# Altium PCB cannonrobot.PcbDoc
Units mil, origin at the board's own origin, x right, y up, seen from the top; angles counter-clockwise.
Board outline 2135 x 2445 mil, 2 copper layers (Top Layer, Bottom Layer); 26 components, 37 nets, 162 pads, 26 vias.
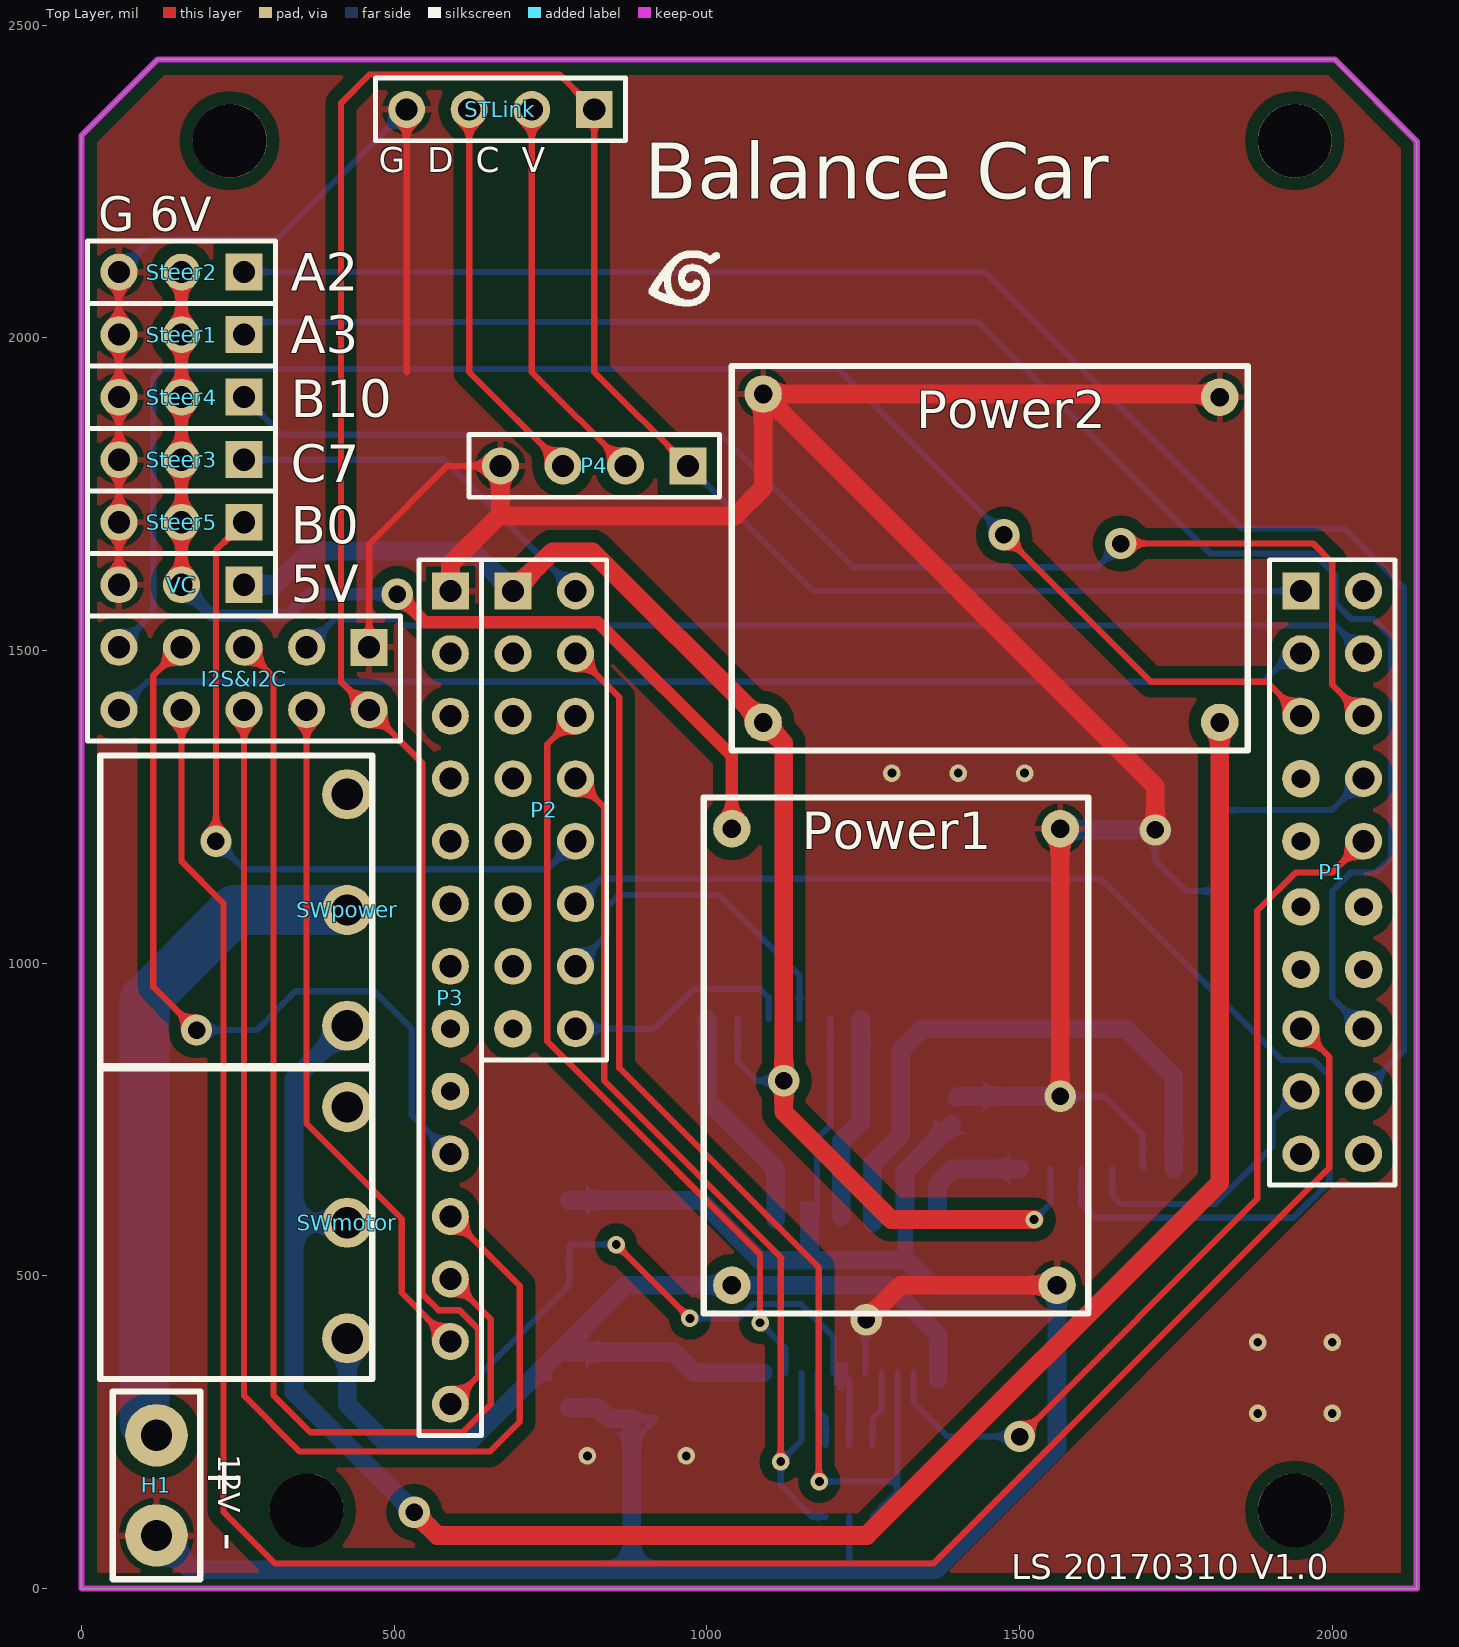
[diagram p0: Top Layer view]
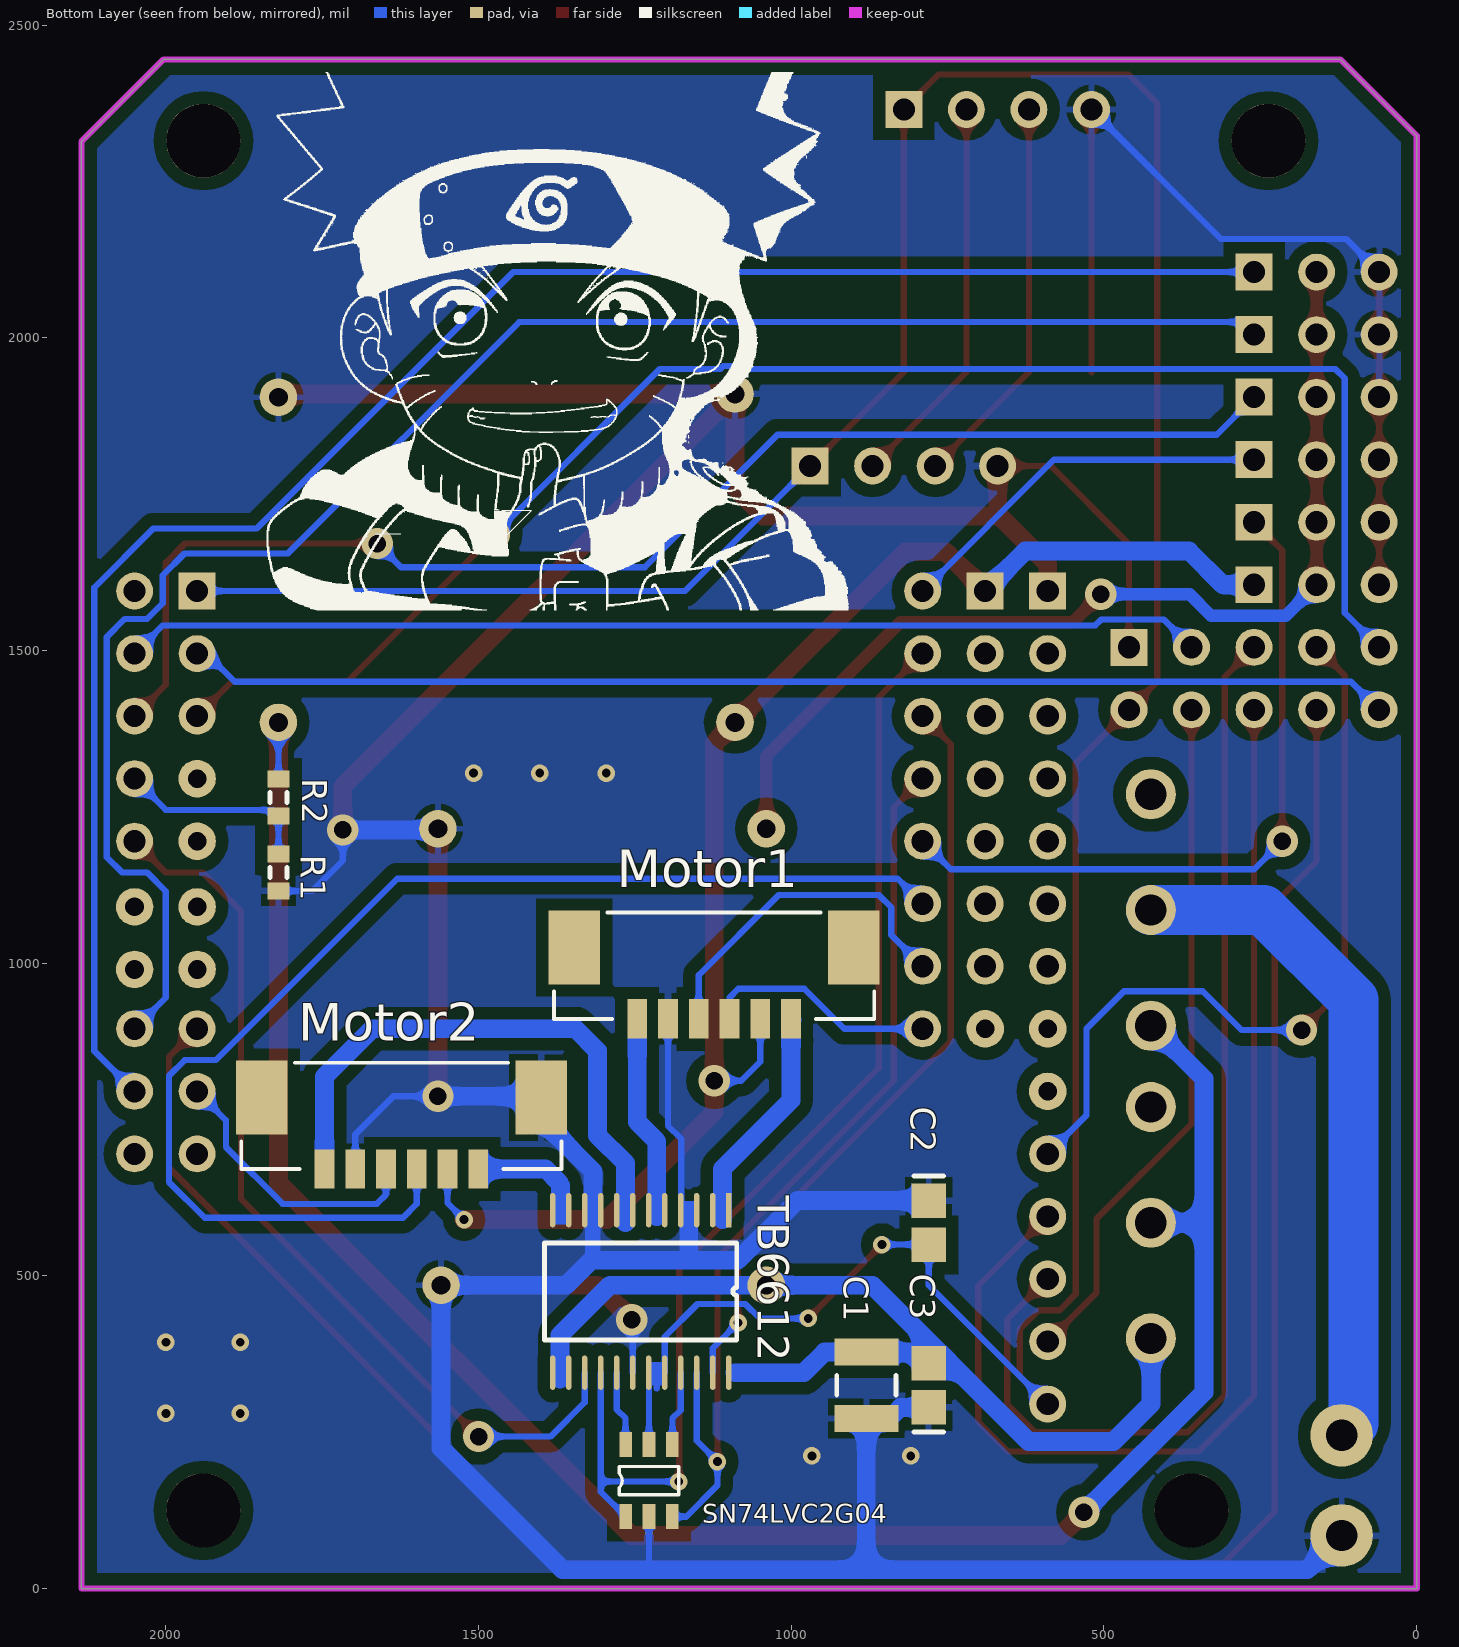
[diagram p1: Bottom Layer view, seen from below]

## Layer stack, top to bottom
Top Solder: solder mask 0.4, Solder Resist, Dk 3.5
Top Layer: signal copper 1.4
Dielectric1: dielectric 12.6, FR-4, Dk 4.8
Bottom Layer: signal copper 1.4
Bottom Solder: solder mask 0.4, Solder Resist, Dk 3.5

## Board outline
0,0 0,2322.83 122.17,2445 2003.82,2445 2135,2313.82 2135,0

## Design rules (kind name [scope] priority, off if disabled: settings)
Clearance Clearance_1 [(InPolygon)] p1: gap=20
Clearance [All] p2: gap=10
ComponentClearance [All] p1: gap=0 collisioncheckmode=3 verticalgap=0 showdistances=FALSE
HoleSize [All] p1: absolutevalues=TRUE maxlimit=200 minlimit=6 maxpercent=80.000 minpercent=20.000
MinimumSolderMaskSliver [All] p1: minsoldermaskwidth=7
PolygonConnect PolygonConnect_1 [IsPoly vs IsVia] p1: connectstyle=Direct reliefconductorwidth=10 reliefentries=4 polygonreliefangle="90 Angle" airgapwidth=10
PolygonConnect [All] p2: connectstyle=Relief reliefconductorwidth=10 reliefentries=4 polygonreliefangle="90 Angle" airgapwidth=10
RoutingVias [All] p1: holewidth=28 width=50 viastyle="Through Hole" minholewidth=28 minwidth=50 maxholewidth=28 maxwidth=50
SilkToSilkClearance [All] p1: silktosilkclearance=0
SilkToSolderMaskClearance SilkscreenOverComponentPads [IsPad] p1: minsilkscreentomaskgap=0 clearancetoexposedcopper=TRUE
SolderMaskExpansion [All] p1: expansion=4
Width [All] p1: maxlimit=100 minlimit=10 preferedwidth=10 minimp=50.000000 maximp=50.000000 favimp=50.000000
25 further rules are at their usual default settings.

## Components (designator, comment, footprint, x,y, rotation, side; value= is the part's Value field where it differs from the comment)
C1 "Cap Semi" CAPC3225L 880,325 r90 bottom locked
C2 "Cap Semi" CAPC2512L 780,585 r270 bottom locked
C3 "Cap Semi" CAPC2512L 780,325 r90 bottom locked
H1 "Header 2" PCBComponent_1#1 120,245 r0 top locked
I2S&I2C "Header 5X2" HDR2X5 460,1505 r180 top locked
Motor1 "Header 8" J_JAT_A1250WV-S-06P 900,1025 r0 bottom locked
Motor2 "Header 8" J_JAT_A1250WV-S-06P 1400,785 r0 bottom locked
P1 "Header 10X2" HDR2X10 1950,1595 r270 top locked
P2 "Header 8X2" HDR2X8 690,1595 r270 top locked
P3 "Header 14" HDR1X14 590,1595 r270 top locked
P4 "Header 4" HDR1X4 970,1795 r180 top locked
Power1 "Header 2X2" PCBComponent_1#2 1040,485 r90 top locked
Power2 "Header 2X2" PCBComponent_1#2 1820,1385 r180 top locked
R1 "Res3" RESC1608L 1820,1145 r90 bottom locked
R2 "Res3" RESC1608L 1820,1265 r90 bottom locked
SN74LVC2G04 "Header 3X2" PCBComponent_1#3 1240,165 r90 bottom locked
Steer1 "Header 3" HDR1X3 260,2005 r180 top locked
Steer2 "Header 3" HDR1X3 260,2105 r180 top locked
Steer3 "Header 3" HDR1X3 260,1805 r180 top locked
Steer4 "Header 3" HDR1X3 260,1905 r180 top locked
Steer5 "Header 3" HDR1X3 260,1705 r180 top locked
STLink "Header 4" HDR1X4 820,2365 r180 top locked
SWmotor "SW-SPST" PCBComponent_1#4 -200,465 r0 top locked
SWpower "SW-SPST" PCBComponent_1#4 -200,965 r0 top locked
TB6612 "Component_1" "SSOP24 - duplicate" 1100,605 r270 bottom locked
VC "Header 3" HDR1X3 260,1605 r180 top locked

## Footprints (in the part's own frame and the unit in brackets; to place one, negate y for a bottom-side part, rotate by r counter-clockwise, add the part's x,y. Pads: shape width x height; smd on the part's side, far side on the other; paste and mask are expansions set on the pad)
CAPC2512L [mm] "Chip Capacitor, Body 2.54x1.27mm, IPC High Density"
  rect 1.4x1.4 smd: 1(-0.9,0) 2(0.9,0)
  silkscreen extent -1.9,-0.6 -1.9,0.6, body extent -1.45,-0.82 1.45,0.82, height 1.3
CAPC3225L [mm] "Chip Capacitor, Body 3.2x2.5mm, IPC High Density"
  rect 1.1x2.6 smd: 1(-1.35,0) 2(1.35,0)
  silkscreen extent -0.4,-1.2 0.4,1.2, body extent -1.7,-1.35 1.7,1.35, height 1.5
HDR1X3 [mm] "Connector; Header; 3 Position"
  rect 1.5x1.5 hole 0.9: 1(0,0)
  round 1.5 hole 0.9: 2(2.54,0) 3(5.08,0)
  silkscreen extent -1.27,-1.27 6.35,1.27
HDR1X4 [mm] "Connector; Header; 4 Position"
  rect 1.5x1.5 hole 0.9: 1(0,0)
  round 1.5 hole 0.9: 2(2.54,0) 3(5.08,0) 4(7.62,0)
  silkscreen extent -1.27,-1.27 8.89,1.27
HDR1X14 [mm] "Connector; Header; 14 Position"
  rect 1.5x1.5 hole 0.9: 1(0,0)
  round 1.5 hole 0.9: 2(2.54,0) 3(5.08,0) 4(7.62,0) 5(10.16,0) 6(12.7,0) 7(15.24,0) 10(22.86,0) 11(25.4,0) 12(27.94,0) 13(30.48,0) 14(33.02,0)
  silkscreen extent -1.27,-1.27 34.29,1.27
HDR2X5 [mm] "Connector; Header; 5x2 Position"
  rect 1.5x1.5 hole 0.9: 1(0,0)
  round 1.5 hole 0.9: 2(0,2.54) 3(2.54,0) 4(2.54,2.54) 5(5.08,0) 6(5.08,2.54) 7(7.62,0) 8(7.62,2.54) 9(10.16,0) 10(10.16,2.54)
  silkscreen extent -1.27,-1.27 11.43,3.81
HDR2X8 [mm] "Connector; Header; 8x2 Position"
  rect 1.5x1.5 hole 0.9: 1(0,0)
  round 1.5 hole 0.9: 2(0,2.54) 3(2.54,0) 4(2.54,2.54) 5(5.08,0) 6(5.08,2.54) 7(7.62,0) 8(7.62,2.54) 9(10.16,0) 10(10.16,2.54) 11(12.7,0) 12(12.7,2.54) 13(15.24,0) 14(15.24,2.54) 16(17.78,2.54)
  silkscreen extent -1.27,-1.27 19.05,3.81
HDR2X10 [mm] "Connector; Header; 10x2 Position"
  rect 1.5x1.5 hole 0.9: 1(0,0)
  round 1.5 hole 0.9: 2(0,2.54) 3(2.54,0) 4(2.54,2.54) 5(5.08,0) 6(5.08,2.54) 8(7.62,2.54) 10(10.16,2.54) 15(17.78,0) 16(17.78,2.54) 17(20.32,0) 18(20.32,2.54) 19(22.86,0) 20(22.86,2.54)
  silkscreen extent -1.27,-1.27 24.13,3.81
J_JAT_A1250WV-S-06P [mm]
  rect 0.8x1.6 smd: 1(2.55,2.9) 2(3.8,2.9) 3(5.05,2.9) 4(6.3,2.9) 5(7.55,2.9) 6(8.8,2.9)
  rect 2.1x3 smd: 7(0,0) 8(11.35,0)
  silkscreen extent -0.82,-1.42 12.17,2.9, body extent -0.4,-1.37 11.75,3.53, height 4.77
PCBComponent_1#1 [mil]
  round 100 hole 50: 1(0,0) 2(0,-160)
  silkscreen extent -70,-230 70,70
PCBComponent_1#2 [mil]
  round 60 hole 30: 1(0,0) 2(730,0) 3(0,-520) 4(730,-525)
  silkscreen extent -45,-570 780,45
PCBComponent_1#3 [mil]
  rect 40x20 smd: 1(-50,25) 2(65,25) 3(-50,-12.5) 4(65,-12.5) 5(-50,-50) 6(65,-50)
  silkscreen extent -15,-60 30,35
PCBComponent_1#4 [mil]
  round 80 / inner round 60 / far side round 80 hole 50: 0(625,305)
  round 80 hole 50: 1(625,120) 2(625,-65)
  silkscreen extent 230,-130 665,367
RESC1608L [mm] "Chip Resistor, Body 1.6x0.8mm, IPC High Density"
  rect 0.7x0.9 smd: 1(-0.75,0) 2(0.75,0)
  silkscreen extent -0.2,-0.35 0.2,0.35, body extent -0.85,-0.48 0.85,0.48, height 0.9
"SSOP24 - duplicate" [mm]
  rect 1.397x0.22 smd: 1(0,0)
  oval 1.397x0.22 smd: 2(0,-0.65) 3(0,-1.3) 4(0,-1.95) 5(0,-2.6) 6(0,-3.25) 7(0,-3.9) 8(0,-4.55) 9(0,-5.2) 10(0,-5.85) 11(0,-6.5) 12(0,-7.15) 13(6.6,-7.15) 14(6.6,-6.5) 15(6.6,-5.85) 16(6.6,-5.2) 17(6.6,-4.55) 18(6.6,-3.9) 19(6.6,-3.25) 20(6.6,-2.6) 21(6.6,-1.95) 22(6.6,-1.3) 23(6.6,-0.65) 24(6.6,0)
  silkscreen extent 1.33,-7.48 5.27,0.33

## Part data
C1 C2 C3: "Capacitor (Semiconductor SIM Model)"
H1: "Header, 2-Pin"
I2S&I2C: "Header, 5-Pin, Dual row"
Motor1 Motor2: "Header, 8-Pin"
P1: "Header, 10-Pin, Dual row"
P2: "Header, 8-Pin, Dual row"
P3: "Header, 14-Pin"
P4 STLink: "Header, 4-Pin"
Power1 Power2: "Header, 2-Pin, Dual row"
R1 R2: "Resistor"
SN74LVC2G04: "Header, 3-Pin, Dual row"
Steer1 Steer2 Steer3 Steer4 Steer5 VC: "Header, 3-Pin"
SWmotor SWpower: "Single-Pole, Single-Throw Switch"

## Free pads (board coordinates)
  round 118.11 hole 118.11: 0(1940,125)
  round 118.11 hole 118.11 unplated: 1(360,125) 2(237,2315) 3(1940,2315)
  round 60 hole 30: 1(590,795) 5(1950,1295) 6(1950,1195) 7(2050,1090) 8(2050,990) 9(1950,1090) 10(1950,990) 11(690,895) 12(590,895)

## Via types
v1: diameter 28, hole 14, Top Layer to Bottom Layer, tented both sides, 15 vias
v2: diameter 50, hole 28, Top Layer to Bottom Layer, tented both sides, 11 vias

## Nets (pads, with @x,y where several pads share a name; then routed paths per layer and width w, separated by ;. In a path a pad name is that pad's centre, name@x,y a point inside that pad or via, vN(x,y) a via of type N, cw(c..) or ccw(c..) an arc to the next point about the centre after c; other vN are vias at no path point)
!C5: SN74LVC2G04.2 TB6612.17 | length 121
  Bottom Layer w10: SN74LVC2G04.2 1265,272 1279.13,286.13 TB6612.17
!C13: SN74LVC2G04.6 TB6612.21 | length 120.6
  Bottom Layer w10: TB6612.21 1176.77,285.23 1190,272 SN74LVC2G04.6
A0: Motor1.3 P2.16 | length 375.3
  Bottom Layer w10: P2.16 915,895 979,959 1084.82,959 1098.82,945 Motor1.3
A1: Motor1.4 P2.14 | length 554.2
  Bottom Layer w10: P2.14 840,1045 840,1089.06 859.94,1109 1020,1109 1148.03,980.97 Motor1.4
A2: P1.18 Steer2.1 | length 2895.7
  Bottom Layer w10: Steer2.1 1445,2105 1855,1695 2020,1695 2114.53,1600.47 2114.53,859.53 P1.18
A3: P1.16 Steer1.1 | length 2787.4
  Bottom Layer w10: Steer1.1 280,2025 1435,2025 1805,1655 1970.27,1655 2005,1620.27 2005,1575.47 2030,1550.47 2065.53,1550.47 2094.53,1521.47 2094.53,1169.53 2070,1145 2030,1145 2000,1115 2000,945 P1.16
A8: Motor2.3 P2.12 | length 2006.8
  Bottom Layer w10: P2.12 830,1135 1630,1135 1920,845 1970,845 1995,820 1995,650 1938,593 1620.82,593 1598.82,615 Motor2.3
A9: Motor2.4 P1.17 | length 448.8
  Bottom Layer w10: Motor2.4 1648.03,629.9 1662.94,615 1813,615 1904,706 1904,749 P1.17
A10: I2S&I2C.8 P1.15 | length 3615
  Top Layer w10: I2S&I2C.8 160,1163 227,1096 227,123 310,40 1362,40 1995,673 1995,850 P1.15
AO1: Motor1.1 TB6612.1 TB6612.2 | length 368.2
  Bottom Layer w30: Motor1.1@999,909.43 Motor1.1 1000.39,780.61 1110,671 1110,590
AO2: Motor1.6 TB6612.5 TB6612.6 | length 328.9
  Bottom Layer w30: 1215,595 1215,715 1246.46,746.46 Motor1.6
B0: P2.10 Steer5.1 | length 1140.9
  Top Layer w10: v2(215,1195) 215,1660 Steer5.1
  Bottom Layer w10: v2(215,1195) 260,1150 744.72,1150 754.72,1160 755,1160 P2.10
B6: I2S&I2C.10 P1.3 | length 1927.3
  Bottom Layer w10: I2S&I2C.10 105,1450 1890,1450 1935,1495 P1.3
B7: I2S&I2C.9 P1.5 | length 2528
  Top Layer w10: v2(1475,1685) 1710,1450 1895,1450 P1.5
  Bottom Layer w10: I2S&I2C.9 115,1560 115,1935 130,1950 1066.36,1950 1071.36,1955 1108.64,1955 1113.64,1950 1210,1950 v2(1475,1685)
B8: P2.6 TB6612.23 | length 1226.1
  Top Layer w10: P2.6 745,1350 745,875 816,804 816,803.64 1085,534.64 v1(1085,425)
  Bottom Layer w10: v1(1085,425) 1125.59,384.41 TB6612.23
B9: P1.10 TB6612.15 | length 1454
  Top Layer w10: v2(1500,243) 1880,623 1880,1083.64 1941.36,1145 2000,1145 P1.10
  Bottom Layer w10: TB6612.15 1330.32,297.68 1385,243 v2(1500,243)
B10: P1.6 Steer4.1 | length 2147.2
  Top Layer w10: v2(1662,1671) 1969.47,1671 2000,1640.47 2000,1445 P1.6
  Bottom Layer w10: Steer4.1 320,1845 1022,1845 1234,1633 1624,1633 v2(1662,1671)
B12: I2S&I2C.4 P3.13 | length 1105.3
  Top Layer w10: I2S&I2C.4 360,743 512,591 512,473 P3.13
B13: I2S&I2C.5 P3.12 | length 1833.1
  Top Layer w10: I2S&I2C.5 307,1458 307,309 366,250 610,250 654.53,294.53 654.53,430.47 P3.12
B14: I2S&I2C.6 P3.11 | length 1968.7
  Top Layer w10: I2S&I2C.6 260,308 349,219 653,219 701,267 701,484 P3.11
B15: I2S&I2C.7 P3.10 | length 1279.4
  Top Layer w10: I2S&I2C.7 115,1460 115,962 v2(184,893)
  Bottom Layer w10: v2(184,893) 280,893 342,955 468,955 528,895 528,757 P3.10
BO1: Motor2.1 TB6612.11 TB6612.12 | length 182.4
  Bottom Layer w30: 1369,600 1369,644 ; 1371,649 1392.83,670.83 Motor2.1
BO2: Motor2.6 TB6612.7 TB6612.8 | length 924
  Bottom Layer w30: 1265,585 1265,680 1310,725 1310,860 1345,895 1670,895 1746.46,818.54 Motor2.6
C3: P1.8 R1.2 R2.1 | length 315.6
  Bottom Layer w10: R1.2 R2.1 1829.53,1245 2000,1245 P1.8
C5: P2.4 SN74LVC2G04.1 TB6612.16 | length 2010.7
  Top Layer w10: P2.4 860,1425 860,832.44 1179,513.44 1179,172 v1(1180,171)
  Bottom Layer w10: v1(1180,171) 1304.72,171 ; SN74LVC2G04.1 1304.72,154.72 1304.72,305.28 ; 1304.72,191.29 1304.72,305.28 ; 1304.72,305.28 TB6612.16 1304.72,305.28
C6: I2S&I2C.3 P1.4 | length 1731
  Bottom Layer w10: I2S&I2C.3 404.53,1549.53 504.47,1549.53 514,1540 2005,1540 P1.4
C7: P2.2 Steer3.1 | length 617
  Bottom Layer w10: Steer3.1 580,1805 P2.2
C13: P2.8 SN74LVC2G04.5 TB6612.22 | length 1535.1
  Top Layer w10: P2.8 836,1249 836,811.92 1119,528.92 1118,527.92 v1(1118,203) v1@1111,196
  Bottom Layer w10: v1@1111,196 1151.18,236.18 TB6612.22 ; v1(1118,203) 1118,165 1168,115 SN74LVC2G04.5
GND: C1.1 C2.1 C3.1 H1.2 I2S&I2C.1 Motor1.5 Motor2.5 Motor2.7 P3.1 P4.4 Power1.3 Power1.4 Power2.3 Power2.4 R1.1 SN74LVC2G04.3 Steer1.3 Steer2.3 Steer3.3 Steer4.3 Steer5.3 STLink.4 TB6612.3 TB6612.4 TB6612.9 TB6612.10 TB6612.18 VC.3 | length 9842
  Top Layer w10: VC.3 Steer5.3 Steer3.3 Steer4.3 Steer1.3 Steer2.3 ; I2S&I2C.1 460,1670 585,1795 P4.4 ; 520,1945 STLink.4 ; Power1.4@1556,1206 Power1.4 ; Power2.3@1815,1910 Power2.3
  Top Layer w30: P3.1 590,1638 670,1718 P4.4 ; 670,1715 1045,1715 1090,1760 Power2.4 ; v2(1255,430) 1310,485 Power1.3 ; v2(1565,787) Power1.4 ; v2(1717,1213) 1717,1283 Power2.4 ; Power2.3@1815,1910 Power2.4
  Bottom Layer w10: Steer2.3 113,2158 313,2158 STLink.4 ; C1.1 918,271.85 890,243.85 890,155 ; 1163,589 1176,602 1176,719 1197.24,740.24 Motor1.5 ; 1227.5,32.5 SN74LVC2G04.3 ; TB6612.18 1253.54,418.54 v2@1255,420 ; 1315,516.57 1315,635 ; v2@1556,786 1557,787 v2(1565,787) 1636,787 1697,726 1697,674.58 Motor2.5@1699,672.58 ; v2(1717,1213) 1717,1164 1765.53,1115.47 R1.1
  Bottom Layer w30: H1.2 175,30 880,30 ; C3.1 825.32,289.57 843.03,271.85 C1.1 880,30 ; C2.1 990,620.43 1085.43,525 1320,525 1360,485 Power1.3 1560,224.29 1365.71,30 880,30 ; 1317,596 1317,667 Motor2.7@1391.76,741.76 ; Motor2.7 1402,787 v2@1557,787 ; Power1.4 1567,1213 v2(1717,1213)
  other v1: 809,212 967,212 1881,280 2000,280 1881,394 2000,394 1296,1304 1402,1304 1508,1304
POWER: H1.1 SWpower.1 | length 1087.5
  Bottom Layer w80: H1.1 101,264 101,941 245,1085 SWpower.1
SWCLK: P4.2 STLink.2 | length 632.1
  Top Layer w10: STLink.2 720,1945 P4.2
SWDIO: P4.3 STLink.3 | length 632.1
  Top Layer w10: STLink.3 620,1945 P4.3
VC3.3: C2.2 I2S&I2C.2 P1.1 P3.14 P4.1 SN74LVC2G04.4 STLink.1 TB6612.19 TB6612.20 | length 5389.2
  Top Layer w10: P3.14 634.53,339.53 634.53,415 604.53,445 571,445 545,471 545,1320 I2S&I2C.2 415,1450 415,2375 461,2421 764,2421 STLink.1 820,1945 P4.1 ; v1(855,550) v1(973,432)
  Bottom Layer w10: P3.14 780,485 C2.2 ; C2.2@780.43,550 v1(855,550) ; P4.1 1170,1595 P1.1 ; v1(973,432) 1050.64,432 1073.64,455 1150,455 1202.36,402.64 TB6612.20 ; 1215,320 1215,345 1227.5,332.5 SN74LVC2G04.4
VC5: Motor1.2 Motor2.2 P2.1 Power2.2 VC.1 | length 2372.3
  Top Layer w30: P2.1 753,1658 817,1658 Power2.2 1123,1352 1123,762 1295,590 v1(1523.18,590)
  Bottom Layer w10: Motor1.2 1049.61,842.39 1080,812 v2(1123,812) ; v1(1523.18,590) 1549.61,616.42 Motor2.2
  Bottom Layer w30: VC.1 310,1605 364,1659 626,1659 P2.1
VC6: Power1.2 Steer1.2 Steer2.2 Steer3.2 Steer4.2 Steer5.2 VC.2 | length 1640.8
  Top Layer w20: VC.2 Steer5.2 Steer3.2 Steer4.2 Steer1.2 Steer2.2 ; v2@507.66,1590 v2(505,1590) 549.53,1545.47 825.53,1545.47 1040,1331 Power1.2
  Bottom Layer w20: VC.2 209.53,1555.47 328.47,1555.47 363,1590 v2(505,1590)
VC11.1: Power2.1 R2.2 SWmotor.1 SWpower.2 | length 3348.9
  Top Layer w30: v2@529,125 569,85 1256,85 1820,649 Power2.1
  Bottom Layer w10: R2.2@1814.53,1300 R2.2 Power2.1
  Bottom Layer w30: 340,585 SWmotor.1 ; SWpower.2 340,815 340,314 v2@529,125
  other v2: 532,122
VM&STEER: C1.2 C3.2 Power1.1 SWmotor.2 TB6612.13 TB6612.14 TB6612.24 | length 1584.1
  Bottom Layer w30: SWmotor.2 425,295 485,235 620.32,235 870.32,485 Power1.1 ; C3.2@780,378.15 C1.2 946.85,378.15 980,345 1090,345 ; Power1.1@1061.21,485 1290,485 1370,405 1370,335
pads on no net: Motor1.7 Motor1.8 Motor2.8 P1.2 P1.19 P1.20 P2.3 P2.5 P2.7 P2.9 P2.11 P2.13 P3.2 P3.3 P3.4 P3.5 P3.6 P3.7 SWmotor.0 SWpower.0

## Polygon pours and split planes (outlines as drawn)
GND on Bottom Layer "Bottom Layer-No Net" (solid, remove dead copper, pour order 0): 2135,0 2135,2313.82 2003.82,2445 122.17,2445 0,2322.83 0,0
GND on Top Layer "Bottom Layer-No Net" (solid, remove dead copper, pour order 2): 2135,0 0,0 0,2322.83 122.17,2445 2003.82,2445 2135,2313.82

## Keep-outs
Keep-Out Layer:
  lines w10: 0,0 2135,0 2135,500 2135,957.5 2135,1872.5 2135,2313.82 2003.82,2445 122.17,2445 0,2322.83 0,0

## Other copper
Bottom Layer:
  rectangle net GND: 1305,525 1330,625
  rectangle net GND: 1149,525 1179,620
  rectangle net VC3.3: 1202.36,325 1225,362.26
  rectangle net BO1: 1357,582 1382,628

## Silkscreen, mask and mechanical layers (free items; w line width, h text height)
Top Overlay:
  drawing of 225 lines, arcs and shapes, not listed
  text "G  D  C  V" at 475,2265 h40
  text "Balance Car" at 900,2222 h90
  text "G 6V" at 27,2170 h55
  text "A2" at 335,2075 h60
  text "A3" at 335,1975 h60
  text "B10" at 335,1873 h60
  text "C7" at 335,1769 h60
  text "B0" at 335,1671 h60
  text "5V" at 335,1577 h60
  text "12V" at 207,215 h60 r270
  text "-  +" at 255,60 h60 r90
  text "LS 20170310 V1.0" at 1487,15 h40
Bottom Overlay:
  drawing of 6815 lines, arcs and shapes, not listed
Bottom Solder:
  lines w20: 425,400 425,295 485,235 620.32,235 870.32,485 1040,485 1280,485 1290,485 1370,405 1370,335 ; 425,585 340,585 340,815 425,900
  lines w40: 101,264 120,245